# EAGLE board LED VCF (EAGLE 6.6.0)
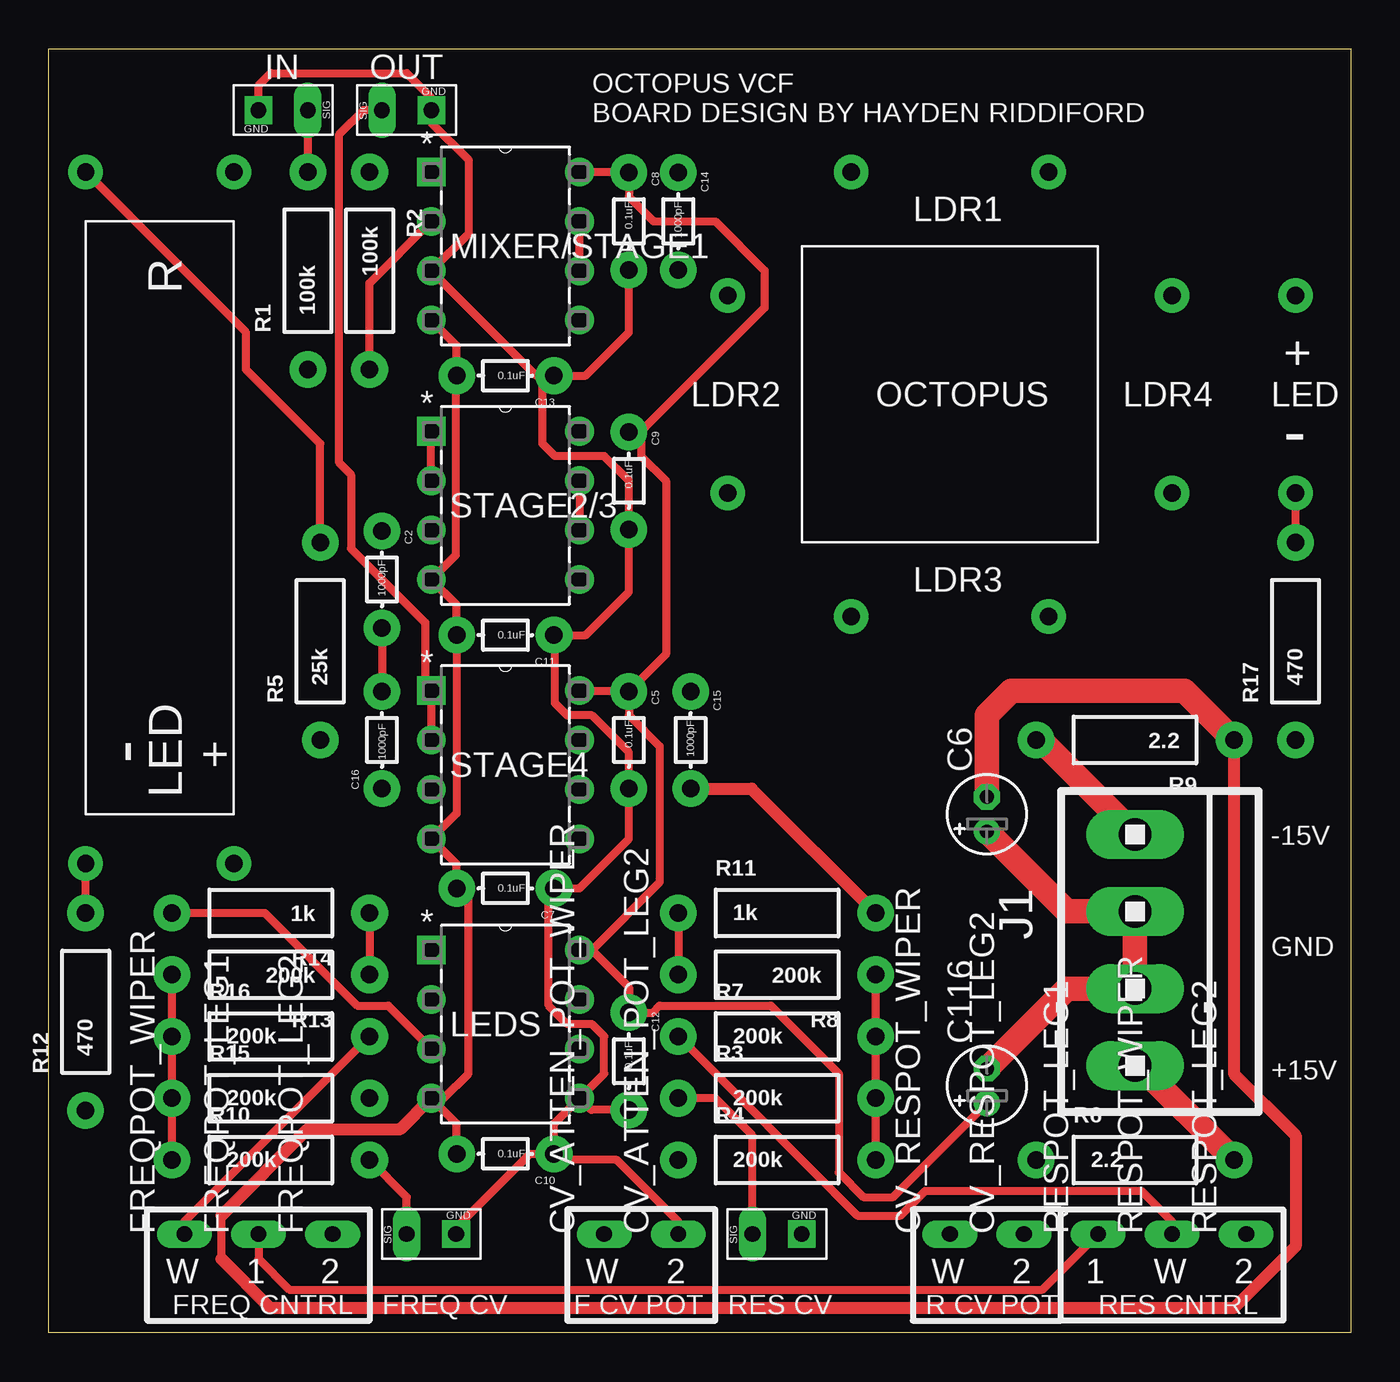
[diagram p0: board, top side]
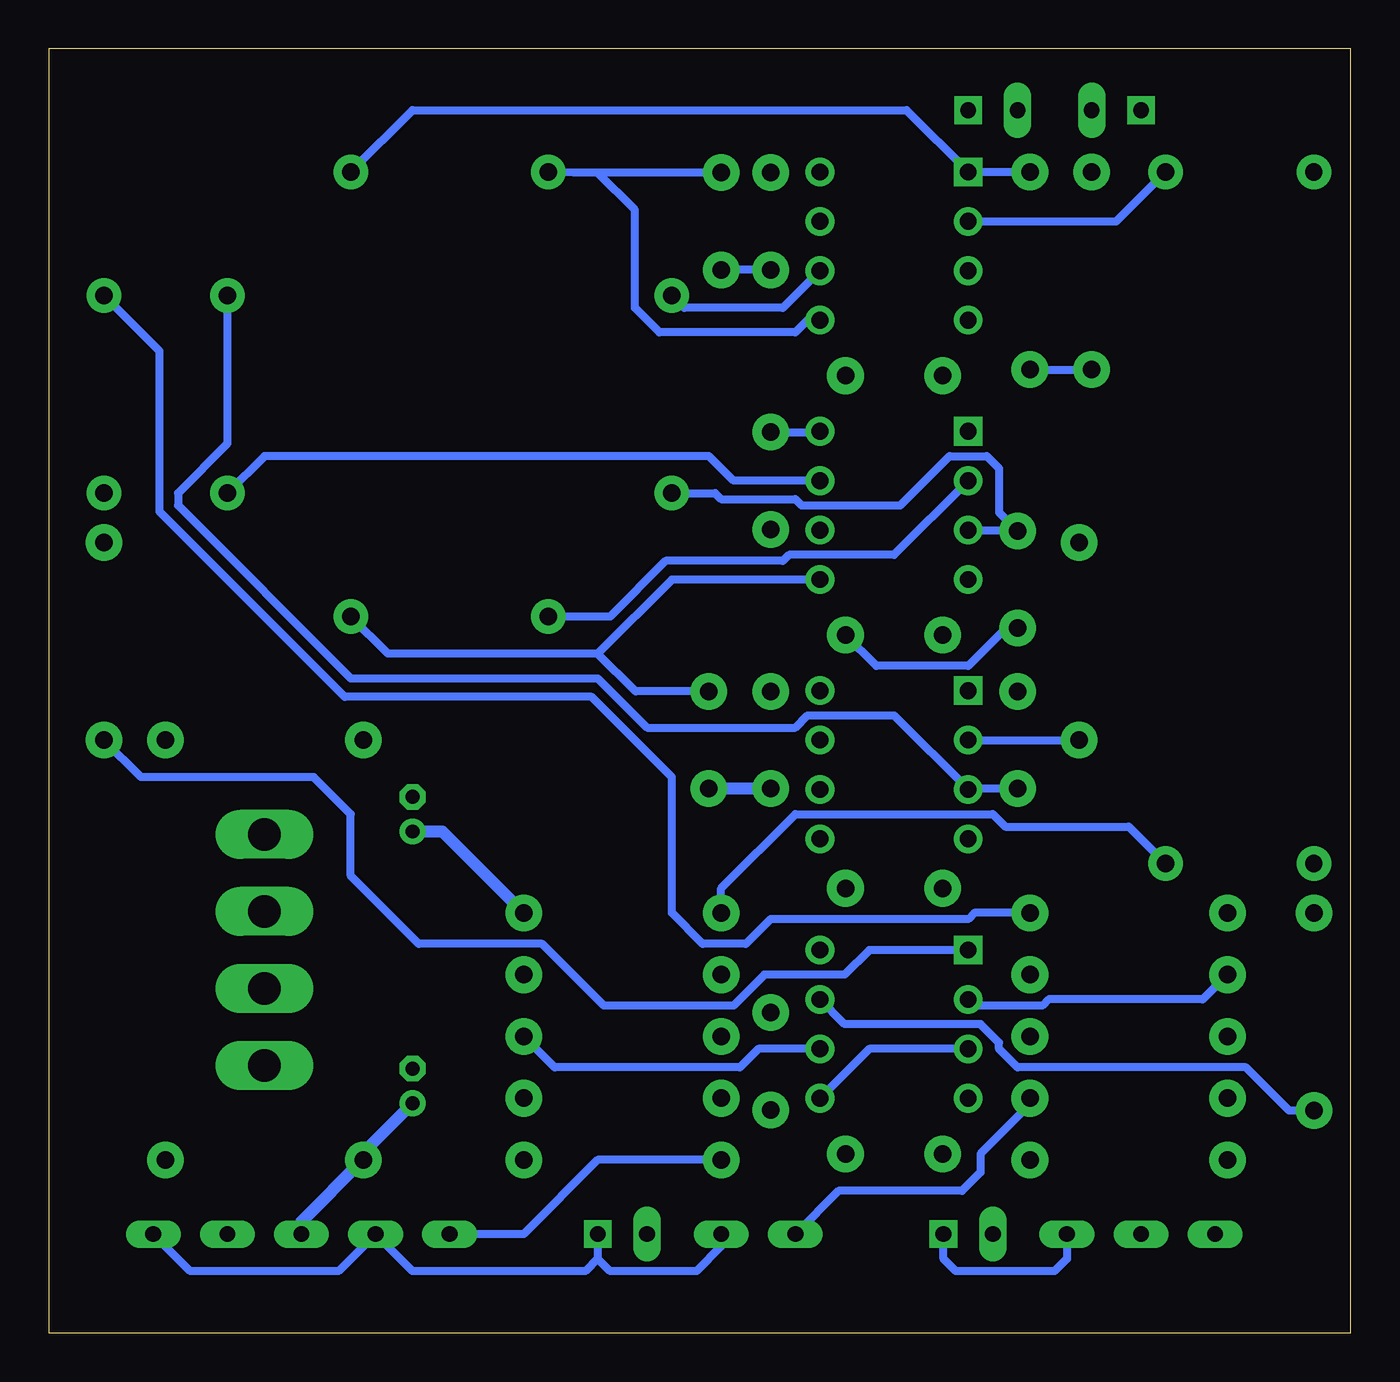
[diagram p1: board, bottom side, seen from below]

Size 66.98 x 66.03 mm. Coordinates in mm from the lower left corner, seen from the top.
Outline: 0,0 0,66.03 66.98,66.03 66.98,0 0,0
Copper layers (1*16): Top 0.035mm / dielectric 1.5mm / Bottom 0.035mm
Design rules "SparkFun": minimum track width 8mil, minimum drill 20mil, track to track 8mil, track to pad 8mil, pad to pad 8mil, via to via 8mil, smd to smd 8mil, copper to edge 10mil, drill to drill 8mil, minimum pad ring 12mil, minimum via ring 10mil, stop-mask expansion 4mil, vias tented up to drill 25mil, thermal gap 10mil

## Footprints (pad centres in the part's own frame; a part is rotated, then mirrored left to right if it is on the bottom)
AXIAL-5MM = drill 0.9 pad 1.88: P$1 -2.5,0; P$2 2.5,0
E1,8-4 = drill 0.711 pad 1.168: + -0.889,0 | drill 0.711 pad 1.168 octagon: - 0.889,0
ELLIPTICALPADSINGLE = drill 0.813 long: P$1 0,0
OFFBOARD2JACK = drill 0.813 square: GND 0,-1.27 | drill 0.813 long: SIGNAL 0,1.27
1X4MTA = drill 1.676 long: 1 5.944,0; 2 1.981,0; 3 -1.981,0; 4 -5.944,0
P8 = drill 0.864 square: 1 -7.62,7.62 | drill 0.864: 2 -7.62,5.08; 3 -7.62,2.54; 4 -7.62,0; 5 0,0; 6 0,2.54; 7 0,5.08; 8 0,7.62
AXIAL-0.4 = drill 0.9 pad 1.88: P$1 -5.08,0; P$2 5.08,0
CUSTOM_VACTROL_HAYDEN = drill 0.889 pad 1.778: LED+ 35.56,7.62; LED- 35.56,0; R1 0,7.62; R2 0,0
OCTOPUS_LED_QUAD_LDR = drill 0.889 pad 1.778: LDR1_1 12.7,19.05; LDR1_2 2.54,19.05; LDR2_1 -3.81,12.7; LDR2_2 -3.81,2.54; LDR3_1 2.54,-3.81; LDR3_2 12.7,-3.81; LDR4_1 19.05,2.54; LDR4_2 19.05,12.7; LED+ 25.4,12.7; LED- 25.4,2.54

## Placement (x,y rotation side)
C2  1000pF  [AXIAL-5MM]  17.14,38.73 270 top
C5  0.1uF  [AXIAL-5MM]  29.84,30.48 270 top
C6  10uF  [E1,8-4]  48.26,26.67 90 top
C7  0.1uF  [AXIAL-5MM]  23.5,22.86 180 top
C8  0.1uF  [AXIAL-5MM]  29.84,57.15 270 top
C9  0.1uF  [AXIAL-5MM]  29.84,43.81 270 top
C10  0.1uF  [AXIAL-5MM]  23.5,9.21 180 top
C11  0.1uF  [AXIAL-5MM]  23.5,35.88 180 top
C12  0.1uF  [AXIAL-5MM]  29.84,13.97 270 top
C13  0.1uF  [AXIAL-5MM]  23.5,49.21 180 top
C14  1000pF  [AXIAL-5MM]  32.38,57.15 270 top
C15  1000pF  [AXIAL-5MM]  33.02,30.48 270 top
C16  1000pF  [AXIAL-5MM]  17.14,30.48 90 top
C116  10uF  [E1,8-4]  48.26,12.7 90 top
CV_ATTEN_POT_LEG2  IOPAD  [ELLIPTICALPADSINGLE]  32.38,5.08 0 top
CV_ATTEN_POT_WIPER  IOPAD  [ELLIPTICALPADSINGLE]  28.57,5.08 0 top
CV_F  OFFBOARD2JACK  [OFFBOARD2JACK]  19.68,5.08 90 top
CV_RES  OFFBOARD2JACK  [OFFBOARD2JACK]  37.47,5.08 90 top
CV_RESPOT_LEG2  IOPAD  [ELLIPTICALPADSINGLE]  50.16,5.08 0 top
CV_RESPOT_WIPER  IOPAD  [ELLIPTICALPADSINGLE]  46.35,5.08 0 top
FREQPOT_LEG1  IOPAD  [ELLIPTICALPADSINGLE]  10.79,5.08 0 top
FREQPOT_LEG2  IOPAD  [ELLIPTICALPADSINGLE]  14.61,5.08 0 top
FREQPOT_WIPER  IOPAD  [ELLIPTICALPADSINGLE]  6.99,5.08 0 top
INPUT_SIGNAL  OFFBOARD2JACK  [OFFBOARD2JACK]  12.06,62.87 270 top
J1  [1X4MTA]  55.88,19.68 270 top
LEDS  TL082B_P_8  [P8]  27.3,12.06 0 top
MIXER/STAGE1  TL082B_P_8  [P8]  27.3,52.07 0 top
OUTPUT_SIGNAL  OFFBOARD2JACK  [OFFBOARD2JACK]  18.41,62.87 90 top
R1  100k  [AXIAL-0.4]  13.34,54.61 90 top
R2  100k  [AXIAL-0.4]  16.51,54.61 270 top
R3  200k  [AXIAL-0.4]  37.47,12.06 0 top
R4  200k  [AXIAL-0.4]  37.47,8.89 0 top
R5  25k  [AXIAL-0.4]  13.97,35.56 90 top
R6  2.2  [AXIAL-0.4]  55.88,8.89 0 top
R7  200k  [AXIAL-0.4]  37.47,15.24 0 top
R8  200k  [AXIAL-0.4]  37.47,18.41 180 top
R9  2.2  [AXIAL-0.4]  55.88,30.48 180 top
R10  200k  [AXIAL-0.4]  11.43,8.89 0 top
R11  1k  [AXIAL-0.4]  37.47,21.59 0 top
R12  470  [AXIAL-0.4]  1.91,16.51 90 top
R13  200k  [AXIAL-0.4]  11.43,18.41 180 top
R14  1k  [AXIAL-0.4]  11.43,21.59 180 top
R15  200k  [AXIAL-0.4]  11.43,12.06 0 top
R16  200k  [AXIAL-0.4]  11.43,15.24 0 top
R17  470  [AXIAL-0.4]  64.14,35.56 90 top
RES_VACTROL  CUSTOM_VACTROL_HAYDENTHROUGH-HOLE  [CUSTOM_VACTROL_HAYDEN]  1.91,59.69 270 top
RESPOT_LEG1  IOPAD  [ELLIPTICALPADSINGLE]  53.98,5.08 0 top
RESPOT_LEG2  IOPAD  [ELLIPTICALPADSINGLE]  61.59,5.08 0 top
RESPOT_WIPER  IOPAD  [ELLIPTICALPADSINGLE]  57.78,5.08 0 top
STAGE2/3  TL082B_P_8  [P8]  27.3,38.73 0 top
STAGE4  TL082B_P_8  [P8]  27.3,25.4 0 top
U$1  OCTOPUS_LED_QUAD_LDRTHROUGH_HOLE  [OCTOPUS_LED_QUAD_LDR]  38.73,40.64 0 top

## Library data of the parts
C2 C5 C7-C16 R1-R17 = SparkFun-Passives
C6 C116 = rcl
CV_ATTEN_POT_LEG2 CV_ATTEN_POT_WIPER CV_F CV_RES CV_RESPOT_LEG2 CV_RESPOT_WIPER FREQPOT_LEG1 FREQPOT_LEG2 FREQPOT_WIPER INPUT_SIGNAL OUTPUT_SIGNAL RESPOT_LEG1 RESPOT_LEG2 RESPOT_WIPER = aarons_library
J1 = con-amp
LEDS MIXER/STAGE1 STAGE2/3 STAGE4 = TL082_TI; DATASHEETURL: http://www.ti.com/lit/gpn/TL082B; DESCRIPTION: JFET-Input Operational Amplifier; FAMILY_NAME: STANDARD LINEAR AMPLIFIER; GENERIC_PART_NUMBER: TL082B; INDUSTRY_STD_PKG_TYPE: PDIP; MANUFACTURER: Texas Instruments; MANUFACTURER_PART_NUMBER: tl082b_p_8; PACKAGE_DESIGNATOR: P; PIN_COUNT: 8; VENDOR: Texas Instruments
RES_VACTROL = Vactrol_Hayden_Custom
U$1 = Octopus_Coupled_LED_Quad_LDR

## Nets
+15V: C5.P$1 C8.P$1 C9.P$1 C12.P$1 C116.+ FREQPOT_LEG1.P$1 LEDS.8 MIXER/STAGE1.8 R6.P$1 RESPOT_LEG1.P$1 STAGE2/3.8 STAGE4.8
-15V: C6.- C7.P$2 C10.P$2 C11.P$2 C13.P$2 LEDS.4 MIXER/STAGE1.4 R9.P$1 STAGE2/3.4 STAGE4.4
AGND: C2.P$2 C5.P$2 C6.+ C7.P$1 C8.P$2 C9.P$2 C10.P$1 C11.P$1 C12.P$2 C13.P$1 C14.P$2 C15.P$2 C16.P$2 C116.- CV_ATTEN_POT_LEG2.P$1 CV_F.GND CV_RES.GND CV_RESPOT_LEG2.P$1 FREQPOT_LEG2.P$1 INPUT_SIGNAL.GND J1.2 J1.3 LEDS.3 LEDS.5 MIXER/STAGE1.3 OUTPUT_SIGNAL.GND R11.P$2 R14.P$2 RESPOT_LEG2.P$1
CV_F_ATTEN: CV_ATTEN_POT_WIPER.P$1 R15.P$2
CV_RES_ATTEN: CV_RESPOT_WIPER.P$1 R4.P$1
FREQ_POT: FREQPOT_WIPER.P$1 R16.P$2
FROM_RES_CNTRL: R5.P$2 RES_VACTROL.R2
LED2+: R8.P$2 R11.P$1 RES_VACTROL.LED+
LED2-: R12.P$2 RES_VACTROL.LED-
LED+: R13.P$1 R14.P$1 U$1.LED+
LED-: R17.P$2 U$1.LED-
MIXER_OUTPUT: MIXER/STAGE1.1 R2.P$1 U$1.LDR1_1
N$1: CV_RES.SIGNAL R3.P$1
N$2: LEDS.6 R3.P$2 R4.P$2 R7.P$2 R8.P$1
N$3: J1.1 R6.P$2
N$4: INPUT_SIGNAL.SIGNAL R1.P$2
N$5: J1.4 R9.P$2
N$6: LEDS.2 R10.P$1 R13.P$2 R15.P$1 R16.P$1
N$7: CV_F.SIGNAL R10.P$2
N$8: LEDS.1 R17.P$1
N$9: LEDS.7 R12.P$1
OUTPUT: OUTPUT_SIGNAL.SIGNAL R5.P$1 STAGE4.1 STAGE4.2
RES_POT: R7.P$1 RESPOT_WIPER.P$1
STAGE1_INPUT: C14.P$1 MIXER/STAGE1.5 U$1.LDR1_2
STAGE1_OUTPUT: MIXER/STAGE1.6 MIXER/STAGE1.7 U$1.LDR2_1
STAGE2_INPUT: C2.P$1 STAGE2/3.3 U$1.LDR2_2
STAGE2_OUTPUT: STAGE2/3.1 STAGE2/3.2 U$1.LDR3_1
STAGE3_INPUT: C15.P$1 STAGE2/3.5 U$1.LDR3_2
STAGE3_OUTPUT: STAGE2/3.6 STAGE2/3.7 U$1.LDR4_1
STAGE4_INPUT: C16.P$1 STAGE4.3 U$1.LDR4_2
TO_RES_CNTRL: MIXER/STAGE1.2 R1.P$1 R2.P$2 RES_VACTROL.R1

## Tracks (layer width: path | path; a pad name or v marks a point on that pad's centre or on a via)
+15V
  Top 0.406: MIXER/STAGE1.8 29.8,59.69 C8.P$1 29.84,58.42 31.11,57.15 34.29,57.15 36.83,54.61 36.83,52.7 30.48,46.35 | C5.P$1 27.34,32.98 STAGE4.8 | 30.48,46.35 29.89,46.35 C9.P$1 | 30.48,46.35 30.48,45.09 31.75,43.81 31.75,34.88 C5.P$1 | LEDS.8 27.94,19.68 | C116.+ 43.43,6.99 41.91,6.99 40.64,8.26 40.64,13.34 37.15,16.83 31.43,16.83 31.07,16.47 C12.P$1 29.84,17.78 27.94,19.68 | FREQPOT_LEG1.P$1 10.79,3.81 12.38,2.22 51.12,2.22 RESPOT_LEG1.P$1 | C5.P$1 29.84,31.75 31.43,30.16 31.43,23.18 27.94,19.68
  Bottom 0.406: RESPOT_LEG1.P$1 53.98,5.71 | C9.P$1 27.34,46.31 STAGE2/3.8
  Bottom 0.61: 53.98,5.71 R6.P$1 50.8,9.27 C116.+
-15V
  Top 0.406: MIXER/STAGE1.4 21,50.76 C13.P$2 20.95,49.17 20.95,40.01 STAGE2/3.4 21,37.42 C11.P$2 21,26.71 STAGE4.4 21,24.09 C7.P$2 21.59,22.27 21.59,13.34 20.32,12.06 LEDS.4 21,10.76 C10.P$2 | 8.89,3.81 8.89,6.03
  Top 0.61: 8.89,3.81 11.43,1.27 60.96,1.27 64.14,4.45 64.14,10.16 60.96,13.34 R9.P$1 | 8.89,6.03 13.34,10.48 18.1,10.48 LEDS.4
  Top 1.27: C6.- 48.26,31.75 49.53,33.02 58.42,33.02 R9.P$1
AGND
  Top 0.406: C13.P$1 27.62,49.21 29.84,51.44 C8.P$2 | C13.P$1 25.4,48.62 25.4,45.72 26.04,45.09 28.57,45.09 29.84,43.81 C9.P$2 29.84,38.1 27.62,35.88 C11.P$1 26.04,35.84 26.04,32.38 26.67,31.75 27.94,31.75 29.84,29.84 C5.P$2 29.84,25.4 27.3,22.86 C7.P$1 25.72,22.58 25.72,16.83 26.67,15.88 27.94,15.88 28.57,15.24 28.57,13.34 LEDS.5 | C13.P$1 25.08,49.21 MIXER/STAGE1.3 21.59,56.52 21.59,60.33 19.68,62.23 OUTPUT_SIGNAL.GND 19.68,63.5 18.41,64.77 11.43,64.77 10.79,64.14 INPUT_SIGNAL.GND | C2.P$2 C16.P$2 | C10.P$1 26,10.76 LEDS.5 | R14.P$2 11.11,21.59 15.88,16.83 17.46,16.83 LEDS.3 | CV_F.GND 20.95,5.4 24.77,9.21 C10.P$1 | CV_ATTEN_POT_LEG2.P$1 32.38,5.71 29.21,8.89 26.31,8.89 C10.P$1 | C12.P$2 27.9,11.47 LEDS.5
  Top 0.61: C15.P$2 36.16,27.98 R11.P$2
  Top 1.27: C116.- 52.38,17.7 J1.2 J1.3 52.38,21.67 C6.+
  Bottom 0.406: C8.P$2 C14.P$2 | C2.P$2 17.74,36.23 19.68,34.29 24.41,34.29 C11.P$1 | LEDS.3 24.77,14.61 LEDS.5 27.34,12.11 | FREQPOT_LEG2.P$1 14.61,3.81 15.24,3.17 20.32,3.17 20.95,3.81 CV_F.GND | CV_ATTEN_POT_LEG2.P$1 32.38,4.45 33.66,3.17 38.1,3.17 38.73,3.81 | CV_RES.GND 38.73,3.81 | 38.73,3.81 39.37,3.17 48.26,3.17 CV_RESPOT_LEG2.P$1 52.07,3.17 59.69,3.17 RESPOT_LEG2.P$1
  Bottom 0.61: C5.P$2 C15.P$2 | C6.+ 46.74,25.78 R11.P$2
CV_F_ATTEN
  Bottom 0.406: R15.P$2 16.51,11.75 19.05,9.21 19.05,8.26 20,7.3 26.35,7.3 CV_ATTEN_POT_WIPER.P$1
CV_RES_ATTEN
  Bottom 0.406: R4.P$1 38.73,8.89 42.55,5.08 CV_RESPOT_WIPER.P$1
FREQ_POT
  Top 0.406: R16.P$2 6.99,5.71 FREQPOT_WIPER.P$1
FROM_RES_CNTRL
  Top 0.406: R5.P$2 13.97,45.72 10.16,49.53 10.16,51.44 RES_VACTROL.R2
LED2+
  Top 0.406: R11.P$1 R8.P$2
  Bottom 0.406: R11.P$1 32.38,22.86 28.57,26.67 18.41,26.67 17.78,26.04 11.43,26.04 RES_VACTROL.LED+
LED2-
  Top 0.406: R12.P$2 RES_VACTROL.LED-
LED+
  Top 0.406: R14.P$1 R13.P$1
  Bottom 0.406: R14.P$1 19.37,21.59 19.68,21.27 29.84,21.27 31.11,20 33.34,20 34.92,21.59 34.92,28.57 39.05,32.7 51.75,32.7 61.28,42.23 61.28,50.48 U$1.LED+
LED-
  Top 0.406: R17.P$2 U$1.LED-
MIXER_OUTPUT
  Bottom 0.406: U$1.LDR1_1 48.26,62.87 22.86,62.87 MIXER/STAGE1.1 R2.P$1
N$1
  Top 0.406: CV_RES.SIGNAL 36.2,10.16 34.29,12.06 R3.P$1
N$2
  Top 0.406: R4.P$2 R3.P$2 R7.P$2 R8.P$1
  Bottom 0.406: LEDS.6 30.48,14.61 31.43,13.65 40.96,13.65 R7.P$2
N$3
  Top 1.27: J1.1 56.11,13.74 R6.P$2
N$4
  Top 0.406: INPUT_SIGNAL.SIGNAL R1.P$2
N$5
  Top 0.813: J1.4 56.11,25.63
  Top 1.27: R9.P$2 51.03,30.48 J1.4
N$6
  Top 0.406: R13.P$2 R16.P$1 R15.P$1 R10.P$1
  Bottom 0.406: R13.P$2 7.62,17.14 15.56,17.14 15.88,16.83 19.37,16.83 LEDS.2
N$7
  Top 0.406: CV_F.SIGNAL 18.41,6.99 R10.P$2
N$8
  Bottom 0.406: LEDS.1 24.77,19.68 26.04,18.41 30.16,18.41 31.75,16.83 38.42,16.83 41.59,20 47.94,20 51.44,23.5 51.44,26.67 53.34,28.57 62.23,28.57 R17.P$1
N$9
  Bottom 0.406: R12.P$1 3.17,11.43 5.4,13.65 17.14,13.65 18.1,14.61 18.1,14.92 19.05,15.88 26.04,15.88 LEDS.7
OUTPUT
  Top 0.406: STAGE4.2 STAGE4.1 19.37,33.34 19.37,36.51 15.56,40.32 15.56,44.13 14.92,44.77 14.92,61.59 16.19,62.87 OUTPUT_SIGNAL.SIGNAL
  Bottom 0.406: STAGE4.2 R5.P$1
RES_POT
  Top 0.406: RESPOT_WIPER.P$1 57.78,5.71 56.2,7.3 45.09,7.3 43.81,6.03 41.59,6.03 R7.P$1
STAGE1_INPUT
  Bottom 0.406: C14.P$1 38.73,59.65 | 38.73,59.65 39.97,59.65 U$1.LDR1_2 | MIXER/STAGE1.5 27.94,52.07 28.57,51.44 35.56,51.44 36.83,52.7 36.83,57.74 38.73,59.65
STAGE1_OUTPUT
  Top 0.406: MIXER/STAGE1.6 MIXER/STAGE1.7
  Bottom 0.406: MIXER/STAGE1.6 29.21,52.7 34.29,52.7 U$1.LDR2_1
STAGE2_INPUT
  Bottom 0.406: U$1.LDR2_2 32.7,43.18 32.38,42.86 28.57,42.86 28.26,42.55 23.18,42.55 20.64,45.09 18.73,45.09 18.1,44.45 18.1,42.19 C2.P$1 17.18,41.27 STAGE2/3.3
STAGE2_OUTPUT
  Top 0.406: STAGE2/3.2 STAGE2/3.1
  Bottom 0.406: STAGE2/3.2 23.5,40.01 28.89,40.01 29.21,39.69 35.24,39.69 38.1,36.83 U$1.LDR3_1
STAGE3_INPUT
  Bottom 0.406: STAGE2/3.5 34.92,38.73 38.73,34.92 | 38.73,34.92 49.53,34.92 U$1.LDR3_2 | C15.P$1 36.79,32.98 38.73,34.92
STAGE3_OUTPUT
  Top 0.406: STAGE2/3.7 STAGE2/3.6
  Bottom 0.406: STAGE2/3.7 31.75,43.81 33.02,45.09 55.88,45.09 U$1.LDR4_1
STAGE4_INPUT
  Bottom 0.406: C16.P$1 19.64,27.98 STAGE4.3 23.5,31.75 27.94,31.75 28.57,31.11 36.2,31.11 38.73,33.66 51.44,33.66 60.33,42.55 60.33,43.18 57.78,45.72 U$1.LDR4_2
TO_RES_CNTRL
  Top 0.406: R2.P$2 16.51,53.98 MIXER/STAGE1.2
  Bottom 0.406: MIXER/STAGE1.2 12.06,57.15 RES_VACTROL.R1 | R2.P$2 R1.P$1

## Text on the board
tPlace: IN | OUT | OCTOPUS VCF / BOARD DESIGN BY HAYDEN RIDDIFORD | -15V | GND | +15V | W | 1 | 2 | W | 2 | W | 2 | 1 | W | 2 | FREQ CNTRL | FREQ CV | F CV POT | RES CV | R CV POT | RES CNTRL